# Altium PCB STM_System_Board.PCBDOC (part 16 of 16)
Units mm, origin at the board's own origin, x right, y up, seen from the top; angles counter-clockwise.
Board outline 222.53 x 100.01 mm, 6 copper layers (Top Layer, Int1 (GND), Int2 (Sign), Layer 1, Layer 2, Bottom Layer), stack 1.526 mm thick; 702 components, 774 nets, 3596 pads, 1988 vias.
Unrouted connection lines stored in the file: 1.
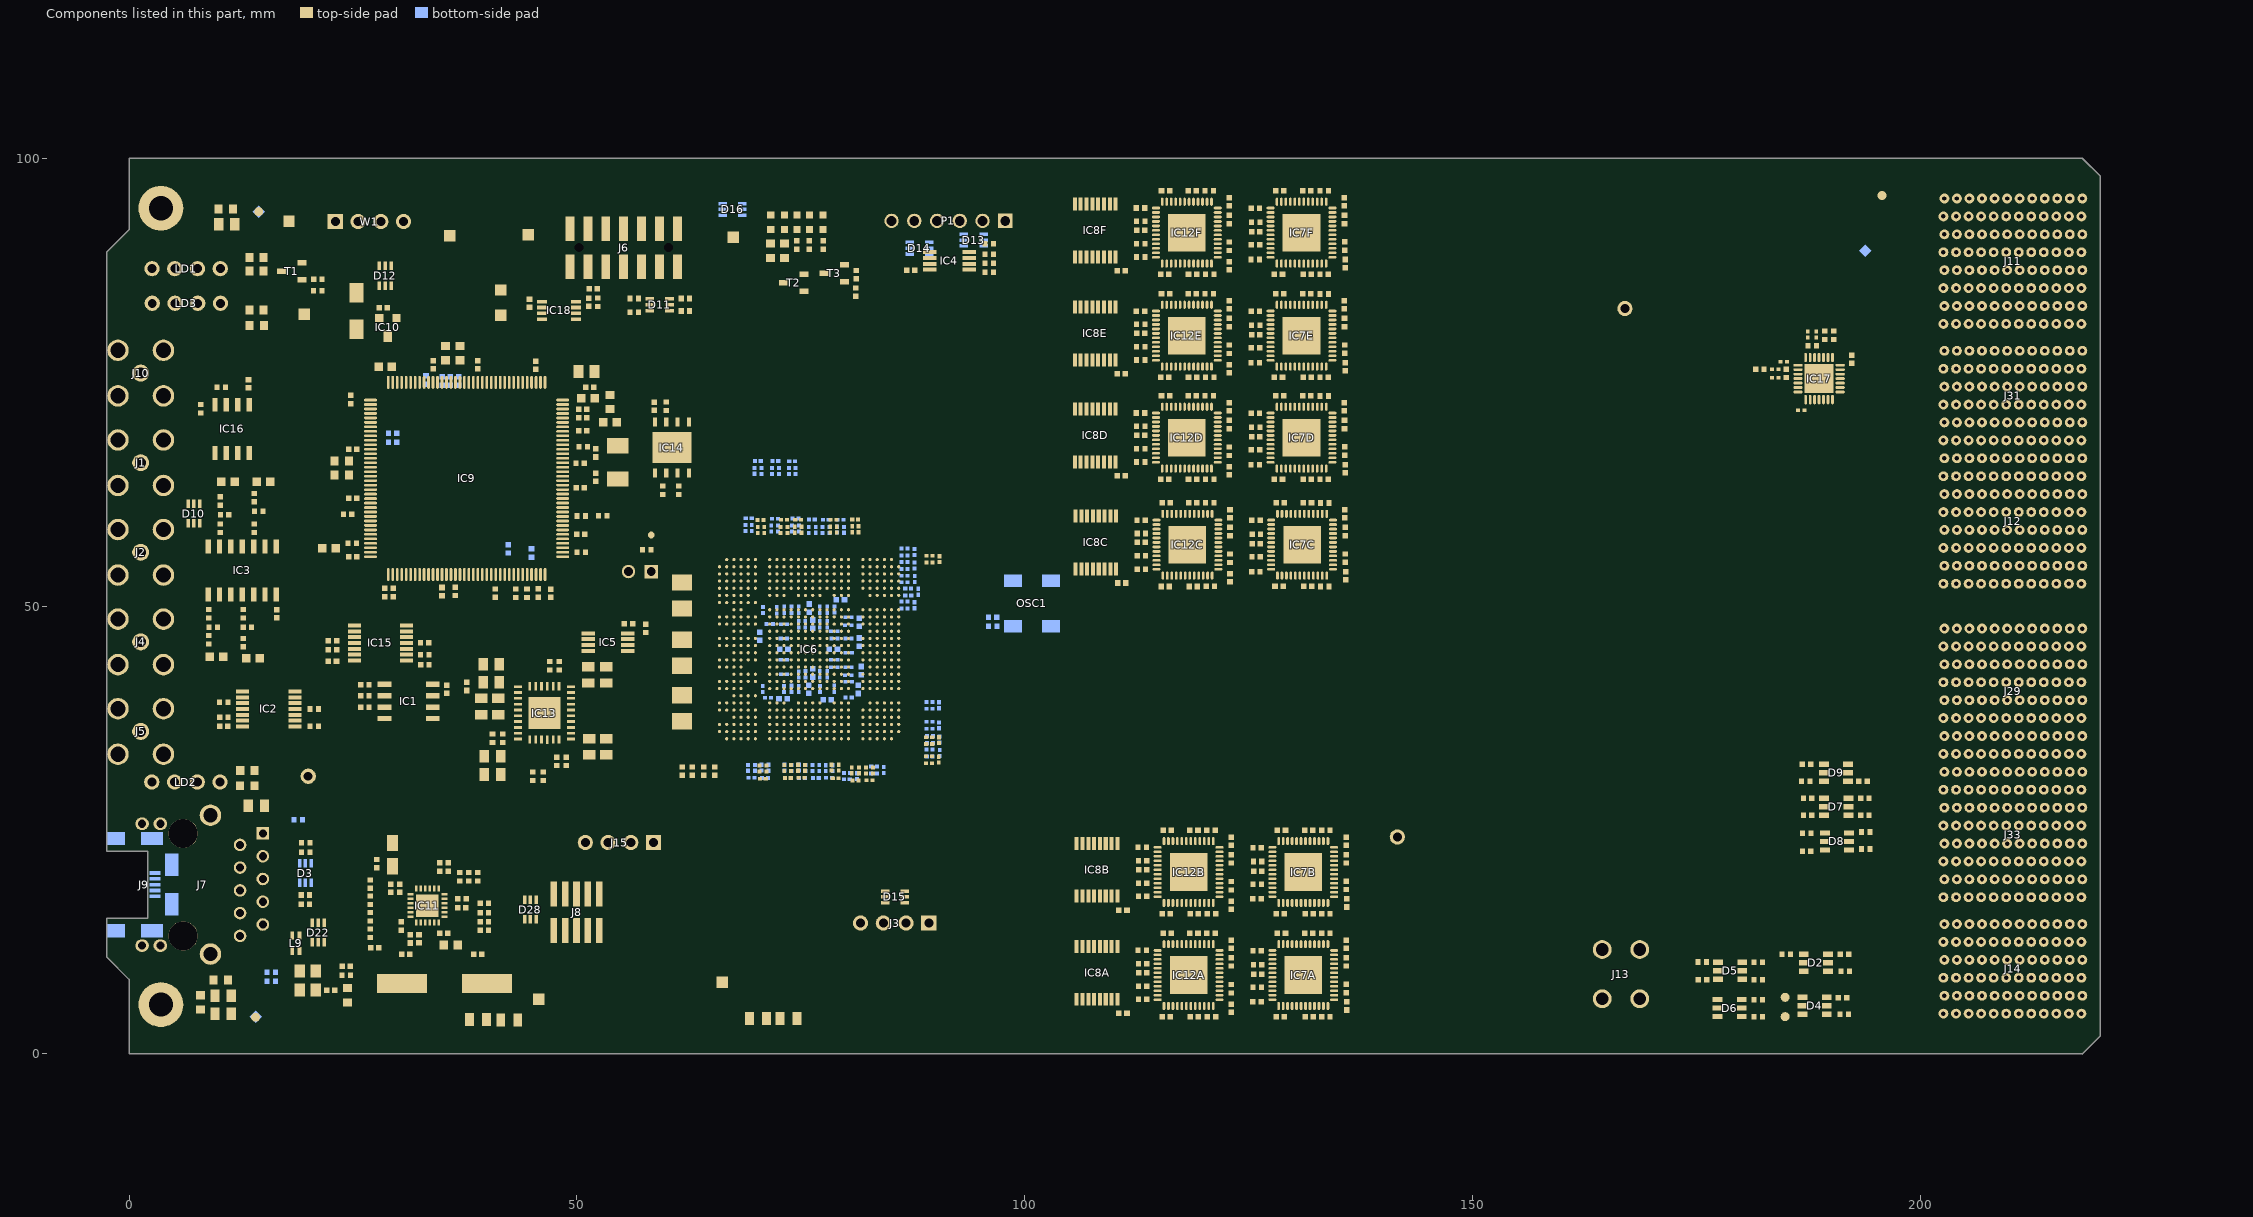
[diagram p19: the components of this part, seen from the top]

## Silkscreen, mask and mechanical layers (free items; w line width, h text height)
Top Overlay:
  drawing of 1241 lines, arcs and shapes, not listed
  text "P2V5" at 76.898,94.747 h1 r90
  text "P3V3" at 72.441,94.717 h1 r90
  text "P12V" at 78.422,94.721 h1 r90
  text "P3V3M" at 73.939,94.691 h1 r90
  text "P1V1" at 75.449,94.654 h1 r90
  text "GND" at 85.825,94.532 h1 r90
  text "MISO" at 88.353,94.518 h1 r90
  text "CS" at 95.997,94.506 h1 r90
  text "FSEN" at 98.54,94.501 h1 r90
  text "MOSI" at 90.906,94.466 h1 r90
  text "SCK" at 93.458,94.449 h1 r90
  text "P3V3" at 15.977,94.158 h1
  text "GND" at 42.722,92.794 h1
  text "P1V1" at 34.05,92.623 h1
  text "UART3" at 23.346,92.599 h1
  text "P2V5" at 65.517,92.554 h1
  text "TX" at 28.678,89.082 h1 r90
  text "RX" at 26.068,89.035 h1 r90
  text "GND" at 31.015,88.396 h1 r90
  text "3V3" at 23.623,88.066 h1 r90
  text "FPGA JTAG" at 64.389,86.309 h1
  text "I2C1 SDA" at 32.525,84.5 h1
  text "GND" at 168.95,82.7 h1
  text "I2C1 SCL" at 32.525,81.7 h1
  text "CPU RST" at 18.186,78.003 h1
  text "BOOT0" at 54.7,51.2 h1
  text "WUT ISE 2024" at 158.996,45.375 h1.02
  text "STM System Board v1.1" at 144.692,42.375 h2.03
  text "Licensed under CERN-OHL-W v2 or later / https://github.com/sinara-hw/STM_Sys_Board" at 141.034,36.175 h1.5
  text "GND" at 21.7,30.45 h1
  text "GND" at 51.3,25.7 h1 r90
  text "SCL" at 54.05,25.7 h1 r90
  text "SDA" at 56.55,25.7 h1 r90
  text "P3V3" at 59.3,25.7 h1 r90
  text "GND" at 143.45,23.7 h1
  text "BP I2C" at 60.45,22.95 h1
  text "CPU JTAG" at 54.102,15.24 h1
  text "GND" at 156.2,11.2 h1
  text "GND" at 82.3,10.2 h1 r90
  text "P3V3" at 43.694,7.171 h1
  text "PWR_SCL" at 84.633,6.2 h1 r90
  text "PWR_SDA" at 87.133,6.2 h1 r90
  text "P3V3_MP" at 89.633,6.2 h1 r90
  text "P12V0" at 156.2,6.2 h1
  text "P12V" at 64.356,5.171 h1
Board Layer Stack Bottom Overlay:
  drawing of 1237 lines, arcs and shapes, not listed
  text "WUT ISE 2024" at 168.433,50.625 h1.02
  text "STM System Board v1.1" at 182.737,47.475 h2.03
  text "Licensed under CERN-OHL-W v2 or later / https://github.com/sinara-hw/STM_Sys_Board" at 186.395,41.4 h1.5
Top Solder:
  rectangle: 0.528,0.578 219.324,2.2
  region: 206.048,51.755 206.048,48.255 220.011,48.255 220.011,51.755
Board Layer Stack Bottom Solder:
  rectangle: 0.603,0.653 219.399,2.275
  rectangle: 32.427,15.656 34.165,17.409
  region: 206.023,51.755 206.023,48.255 219.986,48.255 219.986,51.755
Mechanical1:
  lines w0.1: -2.489,10.809 0,8.32 0,0 218.039,0 ; -2.489,10.82 -2.489,15.138 -1.854,15.138 -1.847,15.145 2.062,15.145 2.062,22.645 -2.489,22.645 ; 218.039,-0.01 220.039,1.99 220.039,97.99 218.039,99.99 ; 218.039,100 0,100 0,92 -1,91 -2.489,89.511 -2.489,22.645 ; -2.489,22.645 -2.489,22.645
  lines w0.381: 40.278,131.814 50.69,131.814 101.475,131.814 116.711,131.814 133.217,131.814 147.692,131.814 159.627,131.814 ; 40.278,134.862 50.69,134.862 101.475,134.862 116.711,134.862 133.217,134.862 147.692,134.862 159.627,134.862 ; 40.278,137.91 50.69,137.91 101.475,137.91 116.711,137.91 133.217,137.91 147.692,137.91 159.627,137.91 ; 40.278,140.958 50.69,140.958 101.475,140.958 116.711,140.958 133.217,140.958 147.692,140.958 159.627,140.958 ; 40.278,144.006 50.69,144.006 101.475,144.006 116.711,144.006 133.217,144.006 147.692,144.006 159.627,144.006 ; 40.278,147.054 50.69,147.054 101.475,147.054 116.711,147.054 133.217,147.054 147.692,147.054 159.627,147.054 ; 40.278,150.102 50.69,150.102 101.475,150.102 116.711,150.102 133.217,150.102 147.692,150.102 159.627,150.102 ; 40.278,153.15 50.69,153.15 101.475,153.15 116.711,153.15 133.217,153.15 147.692,153.15 159.627,153.15 ; 40.278,156.198 50.69,156.198 101.475,156.198 116.711,156.198 133.217,156.198 147.692,156.198 159.627,156.198 ; 40.278,159.246 50.69,159.246 101.475,159.246 116.711,159.246 133.217,159.246 147.692,159.246 159.627,159.246 ; 40.278,162.294 50.69,162.294 101.475,162.294 116.711,162.294 133.217,162.294 147.692,162.294 159.627,162.294 ; 40.278,165.342 50.69,165.342 101.475,165.342 116.711,165.342 133.217,165.342 147.692,165.342 159.627,165.342 ; 40.278,168.39 50.69,168.39 101.475,168.39 116.711,168.39 133.217,168.39 147.692,168.39 159.627,168.39 ; 40.278,171.438 50.69,171.438 101.475,171.438 116.711,171.438 133.217,171.438 147.692,171.438 159.627,171.438 ; 40.278,174.486 50.69,174.486 101.475,174.486 116.711,174.486 133.217,174.486 147.692,174.486 159.627,174.486 ; 40.278,177.534 50.69,177.534 101.475,177.534 116.711,177.534 133.217,177.534 147.692,177.534 159.627,177.534 ; 40.278,180.582 159.627,180.582 ; 50.69,183.63 50.69,128.766 ; 101.475,183.63 101.475,128.766 ; 116.711,183.63 116.711,128.766 ; 133.217,183.63 133.217,128.766 ; 147.692,183.63 147.692,128.766 ; 50.69,128.766 40.278,128.766 40.278,183.63 159.627,183.63 159.627,128.766 147.692,128.766 ; 50.69,128.766 101.475,128.766 ; 101.475,128.766 116.711,128.766 ; 116.711,128.766 133.217,128.766 ; 133.217,128.766 147.692,128.766
  text "Layer" at 42.056,181.344 h1.52
  text "Name" at 52.468,181.344 h1.52
  text "Material" at 103.253,181.344 h1.52
  text "Thickness" at 118.489,181.344 h1.52
  text "Constant" at 134.995,181.344 h1.52
  text "Gerber" at 149.47,181.344 h1.52
  text "Top Overlay" at 52.468,178.296 h1.52
  text "GTO" at 149.47,178.296 h1.52
  text "Top Solder" at 52.468,175.248 h1.52
  text "SM-001" at 103.253,175.248 h1.52
  text "0.025mm" at 118.489,175.248 h1.52
  text "4" at 134.995,175.248 h1.52
  text "GTS" at 149.47,175.248 h1.52
  text "Top Surface Finish" at 52.468,172.2 h1.52
  text "PbSn" at 103.253,172.2 h1.52
  text "0.020mm" at 118.489,172.2 h1.52
  text "1" at 42.056,169.152 h1.52
  text "Top Layer" at 52.468,169.152 h1.52
  text "CF-004" at 103.253,169.152 h1.52
  text "0.053mm" at 118.489,169.152 h1.52
  text "GTL" at 149.47,169.152 h1.52
  text "Dielectric 1" at 52.468,166.104 h1.52
  text "FR4" at 103.253,166.104 h1.52
  text "0.110mm" at 118.489,166.104 h1.52
  text "4.2" at 134.995,166.104 h1.52
  text "2" at 42.056,163.056 h1.52
  text "Int1 (GND)" at 52.468,163.056 h1.52
  text "CF-004" at 103.253,163.056 h1.52
  text "0.018mm" at 118.489,163.056 h1.52
  text "GP1" at 149.47,163.056 h1.52
  text "Dielectric 3" at 52.468,160.008 h1.52
  text "Core-027" at 103.253,160.008 h1.52
  text "0.200mm" at 118.489,160.008 h1.52
  text "4.2" at 134.995,160.008 h1.52
  text "3" at 42.056,156.96 h1.52
  text "Int2 (Sign)" at 52.468,156.96 h1.52
  text "CF-004" at 103.253,156.96 h1.52
  text "0.018mm" at 118.489,156.96 h1.52
  text "G1" at 149.47,156.96 h1.52
  text "Dielectric 6" at 52.468,153.912 h1.52
  text "Core-027" at 103.253,153.912 h1.52
  text "0.730mm" at 118.489,153.912 h1.52
  text "4.2" at 134.995,153.912 h1.52
  text "4" at 42.056,150.864 h1.52
  text "Layer 1" at 52.468,150.864 h1.52
  text "CF-004" at 103.253,150.864 h1.52
  text "0.018mm" at 118.489,150.864 h1.52
  text "G2" at 149.47,150.864 h1.52
  text "Dielectric 2" at 52.468,147.816 h1.52
  text "Core-027" at 103.253,147.816 h1.52
  text "0.200mm" at 118.489,147.816 h1.52
  text "4.2" at 134.995,147.816 h1.52
  text "5" at 42.056,144.768 h1.52
  text "Layer 2" at 52.468,144.768 h1.52
  text "CF-004" at 103.253,144.768 h1.52
  text "0.018mm" at 118.489,144.768 h1.52
  text "GP2" at 149.47,144.768 h1.52
  text "Dielectric 4" at 52.468,141.72 h1.52
  text "FR4" at 103.253,141.72 h1.52
  text "0.110mm" at 118.489,141.72 h1.52
  text "4.2" at 134.995,141.72 h1.52
  text "6" at 42.056,138.672 h1.52
  text "Bottom Layer" at 52.468,138.672 h1.52
  text "CF-004" at 103.253,138.672 h1.52
  text "0.053mm" at 118.489,138.672 h1.52
  text "GBL" at 149.47,138.672 h1.52
  text "Bottom Surface Finish" at 52.468,135.624 h1.52
  text "PbSn" at 103.253,135.624 h1.52
  text "0.020mm" at 118.489,135.624 h1.52
  text "Board Layer Stack Bottom Solder" at 52.468,132.576 h1.52
  text "SM-001" at 103.253,132.576 h1.52
  text "0.025mm" at 118.489,132.576 h1.52
  text "4" at 134.995,132.576 h1.52
  text "GBS" at 149.47,132.576 h1.52
  text "Board Layer Stack Bottom Overlay" at 52.468,129.528 h1.52
  text "GBO" at 149.47,129.528 h1.52
  text "Total board thickness:" at 42.056,126.48 h1.52
  text "1.617mm" at 118.489,126.48 h1.52
Mechanical4:
  lines w0.1: -2.6,-14.238 -2.6,117.232
  lines w0.254: -14.6,13.503 -14.6,94.909
  lines w0.3: 0.482,44 1.75,44 ; 0.482,61 1.75,61 ; 0.914,79.4 1.014,79.5 2.5,79.5 ; 1.232,28.95 2.5,28.95 ; 1.232,35.5 2.5,35.5 ; 1.232,52.5 2.5,52.5 ; 1.232,69.5 2.5,69.5 ; 1.232,76.5 2.5,76.5 3.759,76.5 ; 1.232,86.5 2.5,86.5 ; 1.739,45.562 1.75,45.551 1.75,44 ; 1.739,62.562 1.75,62.551 1.75,61 ; 1.75,42.652 1.75,44 ; 1.75,59.652 1.75,61 ; 2.288,5.512 3.556,5.512 ; 2.464,74.854 2.5,74.89 2.5,79.5 ; 2.489,30.512 2.5,30.501 2.5,28.95 ; 2.489,37.062 2.5,37.051 2.5,35.5 ; 2.489,54.062 2.5,54.051 2.5,52.5 ; 2.489,71.062 2.5,71.051 2.5,69.5 ; 2.489,88.062 2.5,88.051 2.5,86.5 ; 2.5,27.602 2.5,28.95 ; 2.5,34.152 2.5,35.5 ; 2.5,51.152 2.5,52.5 ; 2.5,68.152 2.5,69.5 ; 2.5,81.712 2.5,79.5 ; 2.5,85.152 2.5,86.5 ; 3.545,7.074 3.556,7.063 3.556,5.512 ; 3.556,4.163 3.556,5.512 ; 3.606,44 1.75,44 ; 3.606,61 1.75,61 ; 3.759,79.5 2.5,79.5 ; 4.356,28.95 2.5,28.95 ; 4.356,35.5 2.5,35.5 ; 4.356,52.5 2.5,52.5 ; 4.356,69.5 2.5,69.5 ; 4.356,86.5 2.5,86.5 ; 5.412,5.512 3.556,5.512
Mechanical9:
  lines w0.1: 0,-2.7 0,0
  lines w0.2: -17.4,-2.4 237.575,-2.4 ; -17.4,102.4 237.615,102.4 ; 0.781,-9.895 5.203,-9.895 ; 10.052,-9.895 210.65,-9.895 ; 63,95.89 65,95.89 ; 67,92.49 67,98.8 ; 67,95.89 68.25,95.89 ; 68.25,95.04 68.25,100 ; 70.25,95.89 75.06,95.89 ; 215.383,-9.895 219.804,-9.895 ; 215.826,108.297 215.426,108.697 ; 215.826,109.097 215.426,108.697 ; 217.6,117.4 -17.4,117.4 -17.4,-17.4 237.7,-17.4 ; 227.575,81.434 227.575,100.7 227.575,101.925 220.803,108.697 215.426,108.697 ; 237.615,-17.4 237.615,117.4
  lines w0.254: -6,0 0,0 ; 12,-1.1 12,1.9 ; 12,0 12,100 ; 12,98.89 12,101.89 ; 67,-1.1 67,1.9 ; 67,0 67,100 ; 67,98.9 67,101.9 ; 122,-1.1 122,1.9 ; 122,98.9 122,101.9 ; 177,-1.1 177,1.9 ; 177,0 177,100 ; 177,98.9 177,101.9 ; 184.603,94.903 180.04,99.466 ; 220.015,-2.7 220.015,0 ; 227.025,0.635 227.025,-5.504 225.676,-6.853 ; 270.6,65.219 270.6,77.429 ; 180.04,99.466 181.54,98.966 180.54,97.966 180.04,99.466 ; 225.676,-6.853 226.176,-5.353 227.176,-6.353 225.676,-6.853
  text "Area Without Copper and Without Solder Mask - On Both Sides" at 66.7,110.8 h2.54
  text "6.0" at 127.744,96.74 h1.5
  text "1.25" at 71.044,96.69 h1.5
  text "NOT PLATED HOLES" at 184.875,95.54 h2
  text "Ø0.8" at 268.74,77.379 h2 r270
  text "3x OPTICAL TARGET" at 226.97,74.98 h3 r90
  text "Ø2mm Not Drilled" at 229.828,74.98 h3 r90
  text "Dimensions are rounded to 0.1mm. Gerber data is the reference" at 236.55,7.62 h3 r90
  text "ALL DIMENSIONS ARE IN MILLIMETERS" at 233.693,1.588 h5 r90
  text "Ø3.5 ±0.05" at 226.073,1.27 h2 r90
  text "NOT PLATED HOLE" at 227.978,1.27 h2 r90
  text "Area Without Copper and Without Solder Mask - On Both Sides" at 70.5,-7.6 h2.54

## Dimensions
0,25.372 to 0,87.872 on Mechanical2
-0.01,-0.025 to 0,7.222 on Mechanical2
0,99.99 to 220.031,104.99 on Mechanical2
226.2,-0.01 to 224.015,99.99 on Mechanical2
-27.675,-90.84 to -19.275,-73.45 on Mechanical9
-17.4,-17.4 to -2.4,-9.9 on Mechanical9
-17.4,-17.4 to -17.4,102.4 on Mechanical9
204.921,36.503 to 217.6,117.4 on Mechanical9
202.381,39.598 to 237.615,117.4 on Mechanical9
0,10.19 to 3.5,8.722 on Mechanical2

## Text inside footprints (layer, text, board x,y; h text height)
J11: Top Overlay "1" at 197.989,81.14 h1 r90; Top Overlay "2" at 197.989,83.14 h1 r90; Top Overlay "3" at 197.989,85.14 h1 r90; Top Overlay "4" at 197.989,87.14 h1 r90; Top Overlay "5" at 197.989,89.14 h1 r90; Top Overlay "6" at 197.989,91.14 h1 r90; Top Overlay "7" at 197.989,93.14 h1 r90; Top Overlay "8" at 197.989,95.14 h1 r90; DrillDrawing "Diam. 0.5mm +/-0.05" at 201.689,50.325 h1; DrillDrawing "PRESS-FIT TECHNOLOGY" at 201.689,48.825 h1; Mechanical8 "Top Surface of Mother Board" at 232.289,84.115 h0.5 r90; Mechanical8 "Edge of Daugher Card" at 220.789,85.265 h0.5 r90; Mechanical14 "1" at 197.989,81.14 h1 r90; Mechanical14 "L" at 203.039,79.29 h1 r90; Mechanical14 "2" at 197.989,83.14 h1 r90; Mechanical14 "K" at 204.439,79.29 h1 r90; Mechanical14 "J" at 205.839,79.29 h1 r90; Mechanical14 "3" at 197.989,85.14 h1 r90; Mechanical14 "4" at 197.989,87.14 h1 r90; Mechanical14 "I" at 207.239,79.54 h1 r90; Mechanical14 "H" at 208.639,79.29 h1 r90; Mechanical14 "G" at 210.039,79.29 h1 r90; Mechanical14 "5" at 197.989,89.14 h1 r90; Mechanical14 "6" at 197.989,91.14 h1 r90; Mechanical14 "7" at 197.989,93.14 h1 r90; Mechanical14 "8" at 197.989,95.14 h1 r90; Mechanical14 "F" at 211.439,79.29 h1 r90; Mechanical14 "E" at 212.839,79.29 h1 r90; Mechanical14 "D" at 214.239,79.29 h1 r90; Mechanical14 "C" at 215.639,78.29 h1 r90; Mechanical14 "B" at 217.039,78.29 h1 r90; Mechanical14 "A" at 218.439,78.29 h1 r90
J12: Top Overlay "1" at 197.989,52.14 h1 r90; Top Overlay "2" at 197.989,54.14 h1 r90; Top Overlay "3" at 197.989,56.14 h1 r90; Top Overlay "4" at 197.989,58.14 h1 r90; Top Overlay "5" at 197.989,60.14 h1 r90; Top Overlay "6" at 197.989,62.14 h1 r90; Top Overlay "7" at 197.989,64.14 h1 r90; Top Overlay "8" at 197.989,66.14 h1 r90; Mechanical8 "Top Surface of Mother Board" at 232.289,55.115 h0.5 r90; Mechanical8 "Edge of Daugher Card" at 220.789,56.265 h0.5 r90; Mechanical14 "1" at 197.989,52.14 h1 r90; Mechanical14 "L" at 203.039,50.29 h1 r90; Mechanical14 "2" at 197.989,54.14 h1 r90; Mechanical14 "K" at 204.439,50.29 h1 r90; Mechanical14 "J" at 205.839,50.29 h1 r90; Mechanical14 "3" at 197.989,56.14 h1 r90; Mechanical14 "4" at 197.989,58.14 h1 r90; Mechanical14 "I" at 207.239,50.54 h1 r90; Mechanical14 "H" at 208.639,50.29 h1 r90; Mechanical14 "G" at 210.039,50.29 h1 r90; Mechanical14 "5" at 197.989,60.14 h1 r90; Mechanical14 "6" at 197.989,62.14 h1 r90; Mechanical14 "7" at 197.989,64.14 h1 r90; Mechanical14 "8" at 197.989,66.14 h1 r90; Mechanical14 "F" at 211.439,50.29 h1 r90; Mechanical14 "E" at 212.839,50.29 h1 r90; Mechanical14 "D" at 214.239,50.29 h1 r90; Mechanical14 "C" at 215.639,50.29 h1 r90; Mechanical14 "B" at 217.039,50.29 h1 r90; Mechanical14 "A" at 218.439,50.29 h1 r90
J13: Top Overlay "4" at 169.407,2.709 h1; Top Overlay "1" at 160.948,12.491 h1; Mechanical14 "4" at 169.407,2.709 h1; Mechanical14 "1" at 160.948,12.491 h1
J14: Top Overlay "6" at 197.989,14.15 h1 r90; Top Overlay "5" at 197.989,12.15 h1 r90; Top Overlay "4" at 197.989,10.15 h1 r90; Top Overlay "3" at 197.989,8.15 h1 r90; Top Overlay "2" at 197.989,6.15 h1 r90; Top Overlay "1" at 197.989,4.15 h1 r90; Top Overlay "L" at 203.039,2.3 h1 r90; Top Overlay "K" at 204.439,2.3 h1 r90; Top Overlay "J" at 205.839,2.3 h1 r90; Top Overlay "I" at 207.239,2.55 h1 r90; Top Overlay "H" at 208.639,2.3 h1 r90; Top Overlay "G" at 210.039,2.3 h1 r90; Top Overlay "F" at 211.439,2.3 h1 r90; Top Overlay "E" at 212.839,2.3 h1 r90; Top Overlay "D" at 214.239,2.3 h1 r90; Top Overlay "C" at 215.639,1.3 h1 r90; Top Overlay "B" at 217.039,1.3 h1 r90; Top Overlay "A" at 218.439,1.3 h1 r90; DrillDrawing "Diam. 0.5mm +/-0.05" at 218.689,18.5 h1 r180; DrillDrawing "PRESS-FIT TECHNOLOGY" at 218.689,17 h1 r180; Mechanical8 "Edge of Daugher Card" at 220.789,6.275 h0.5 r90; Mechanical8 "Top Surface of Mother Board" at 232.289,5.125 h0.5 r90; Mechanical14 "6" at 197.989,14.15 h1 r90; Mechanical14 "5" at 197.989,12.15 h1 r90; Mechanical14 "4" at 197.989,10.15 h1 r90; Mechanical14 "3" at 197.989,8.15 h1 r90; Mechanical14 "2" at 197.989,6.15 h1 r90; Mechanical14 "1" at 197.989,4.15 h1 r90; Mechanical14 "L" at 203.039,2.3 h1 r90; Mechanical14 "K" at 204.439,2.3 h1 r90; Mechanical14 "J" at 205.839,2.3 h1 r90; Mechanical14 "I" at 207.239,2.55 h1 r90; Mechanical14 "H" at 208.639,2.3 h1 r90; Mechanical14 "G" at 210.039,2.3 h1 r90; Mechanical14 "F" at 211.439,2.3 h1 r90; Mechanical14 "E" at 212.839,2.3 h1 r90; Mechanical14 "D" at 214.239,2.3 h1 r90; Mechanical14 "C" at 215.639,1.3 h1 r90; Mechanical14 "B" at 217.039,1.3 h1 r90; Mechanical14 "A" at 218.439,1.3 h1 r90
J29: Top Overlay "8" at 197.989,47.14 h1 r90; Top Overlay "7" at 197.989,45.14 h1 r90; Top Overlay "6" at 197.989,43.14 h1 r90; Top Overlay "5" at 197.989,41.14 h1 r90; Top Overlay "4" at 197.989,39.14 h1 r90; Top Overlay "3" at 197.989,37.14 h1 r90; Top Overlay "2" at 197.989,35.14 h1 r90; Top Overlay "1" at 197.989,33.14 h1 r90; Mechanical8 "Edge of Daugher Card" at 220.789,37.265 h0.5 r90; Mechanical8 "Top Surface of Mother Board" at 232.289,36.115 h0.5 r90; Mechanical14 "A" at 218.439,31.29 h1 r90; Mechanical14 "B" at 217.039,31.29 h1 r90; Mechanical14 "C" at 215.639,31.29 h1 r90; Mechanical14 "D" at 214.239,31.29 h1 r90; Mechanical14 "E" at 212.839,31.29 h1 r90; Mechanical14 "F" at 211.439,31.29 h1 r90; Mechanical14 "8" at 197.989,47.14 h1 r90; Mechanical14 "7" at 197.989,45.14 h1 r90; Mechanical14 "6" at 197.989,43.14 h1 r90; Mechanical14 "5" at 197.989,41.14 h1 r90; Mechanical14 "G" at 210.039,31.29 h1 r90; Mechanical14 "H" at 208.639,31.29 h1 r90; Mechanical14 "I" at 207.239,31.54 h1 r90; Mechanical14 "4" at 197.989,39.14 h1 r90; Mechanical14 "3" at 197.989,37.14 h1 r90; Mechanical14 "J" at 205.839,31.29 h1 r90; Mechanical14 "K" at 204.439,31.29 h1 r90; Mechanical14 "2" at 197.989,35.14 h1 r90; Mechanical14 "L" at 203.039,31.29 h1 r90; Mechanical14 "1" at 197.989,33.14 h1 r90
J31: Top Overlay "1" at 197.989,68.14 h1 r90; Top Overlay "2" at 197.989,70.14 h1 r90; Top Overlay "3" at 197.989,72.14 h1 r90; Top Overlay "4" at 197.989,74.14 h1 r90; Top Overlay "5" at 197.989,76.14 h1 r90; Top Overlay "6" at 197.989,78.14 h1 r90; Mechanical8 "Edge of Daugher Card" at 220.789,70.265 h0.5 r90; Mechanical8 "Top Surface of Mother Board" at 232.289,69.115 h0.5 r90; Mechanical14 "L" at 203.039,66.29 h1 r90; Mechanical14 "2" at 197.989,70.14 h1 r90; Mechanical14 "1" at 197.989,68.14 h1 r90; Mechanical14 "J" at 205.839,66.29 h1 r90; Mechanical14 "K" at 204.439,66.29 h1 r90; Mechanical14 "3" at 197.989,72.14 h1 r90; Mechanical14 "I" at 207.239,66.54 h1 r90; Mechanical14 "H" at 208.639,66.29 h1 r90; Mechanical14 "G" at 210.039,66.29 h1 r90; Mechanical14 "4" at 197.989,74.14 h1 r90; Mechanical14 "5" at 197.989,76.14 h1 r90; Mechanical14 "6" at 197.989,78.14 h1 r90; Mechanical14 "E" at 212.839,66.29 h1 r90; Mechanical14 "F" at 211.439,66.29 h1 r90; Mechanical14 "D" at 214.239,66.29 h1 r90; Mechanical14 "B" at 217.039,66.29 h1 r90; Mechanical14 "C" at 215.639,66.29 h1 r90; Mechanical14 "A" at 218.439,66.29 h1 r90
J33: Top Overlay "8" at 197.989,31.14 h1 r90; Top Overlay "7" at 197.989,29.14 h1 r90; Top Overlay "6" at 197.989,27.14 h1 r90; Top Overlay "5" at 197.989,25.14 h1 r90; Top Overlay "4" at 197.989,23.14 h1 r90; Top Overlay "3" at 198.025,21.365 h1 r90; Top Overlay "2" at 197.95,19.89 h1 r90; Top Overlay "1" at 197.975,17.565 h1 r90; Mechanical8 "Edge of Daugher Card" at 220.789,21.265 h0.5 r90; Mechanical8 "Top Surface of Mother Board" at 232.289,20.115 h0.5 r90; Mechanical14 "A" at 218.439,15.29 h1 r90; Mechanical14 "B" at 217.039,15.29 h1 r90; Mechanical14 "C" at 215.639,15.29 h1 r90; Mechanical14 "D" at 214.239,15.29 h1 r90; Mechanical14 "E" at 212.839,15.29 h1 r90; Mechanical14 "F" at 211.439,15.29 h1 r90; Mechanical14 "8" at 197.989,31.14 h1 r90; Mechanical14 "7" at 197.989,29.14 h1 r90; Mechanical14 "6" at 197.989,27.14 h1 r90; Mechanical14 "5" at 197.989,25.14 h1 r90; Mechanical14 "G" at 210.039,15.29 h1 r90; Mechanical14 "H" at 208.639,15.29 h1 r90; Mechanical14 "I" at 207.239,15.54 h1 r90; Mechanical14 "4" at 197.989,23.14 h1 r90; Mechanical14 "3" at 197.989,21.14 h1 r90; Mechanical14 "J" at 205.839,15.29 h1 r90; Mechanical14 "K" at 204.439,15.29 h1 r90; Mechanical14 "2" at 197.989,19.14 h1 r90; Mechanical14 "L" at 203.039,15.29 h1 r90; Mechanical14 "1" at 197.989,17.14 h1 r90
P1: Top Overlay "6" at 85.495,91.292 h1.02 r180; Top Overlay "1" at 97.935,91.292 h1.02 r180